# Altium PCB PCB1.PcbDoc
Units mil, origin at the board's own origin, x right, y up, seen from the top; angles counter-clockwise.
Board outline 6000 x 4000 mil, 2 copper layers (Top Layer, Bottom Layer); 24 components, 24 nets, 167 pads, 20 vias.
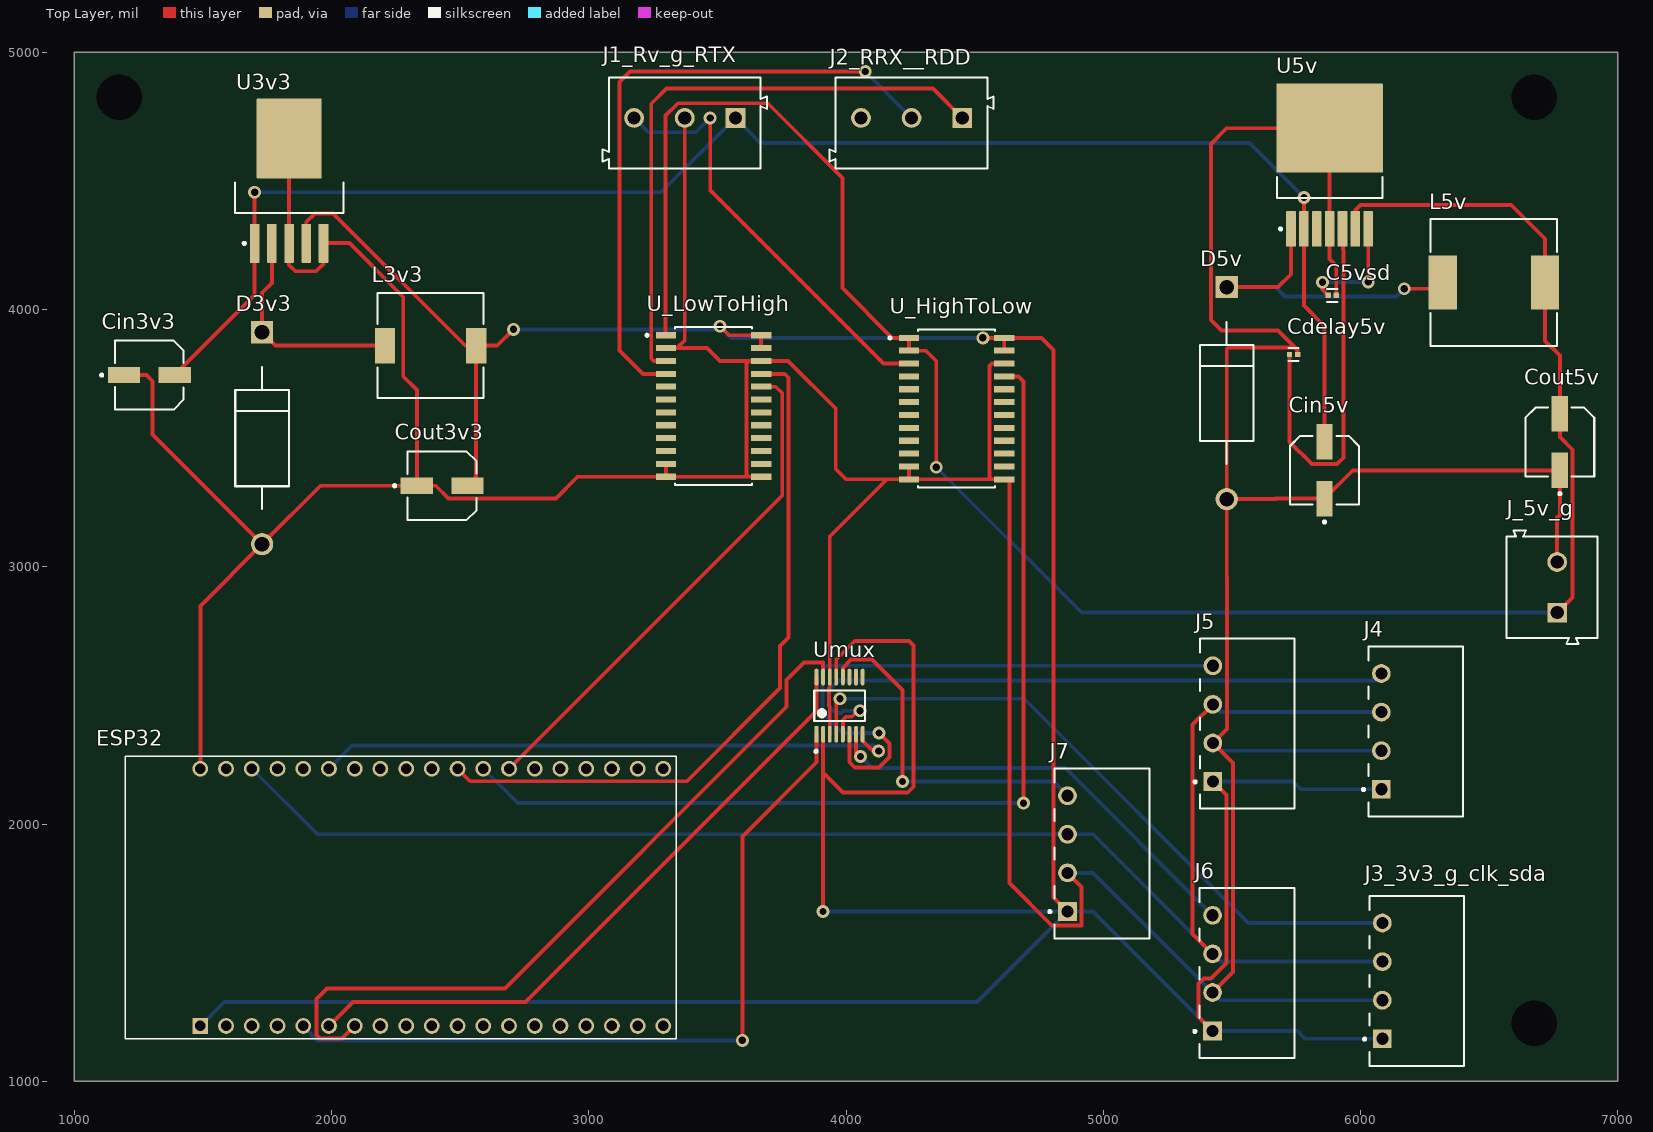
[diagram p0: Top Layer view]
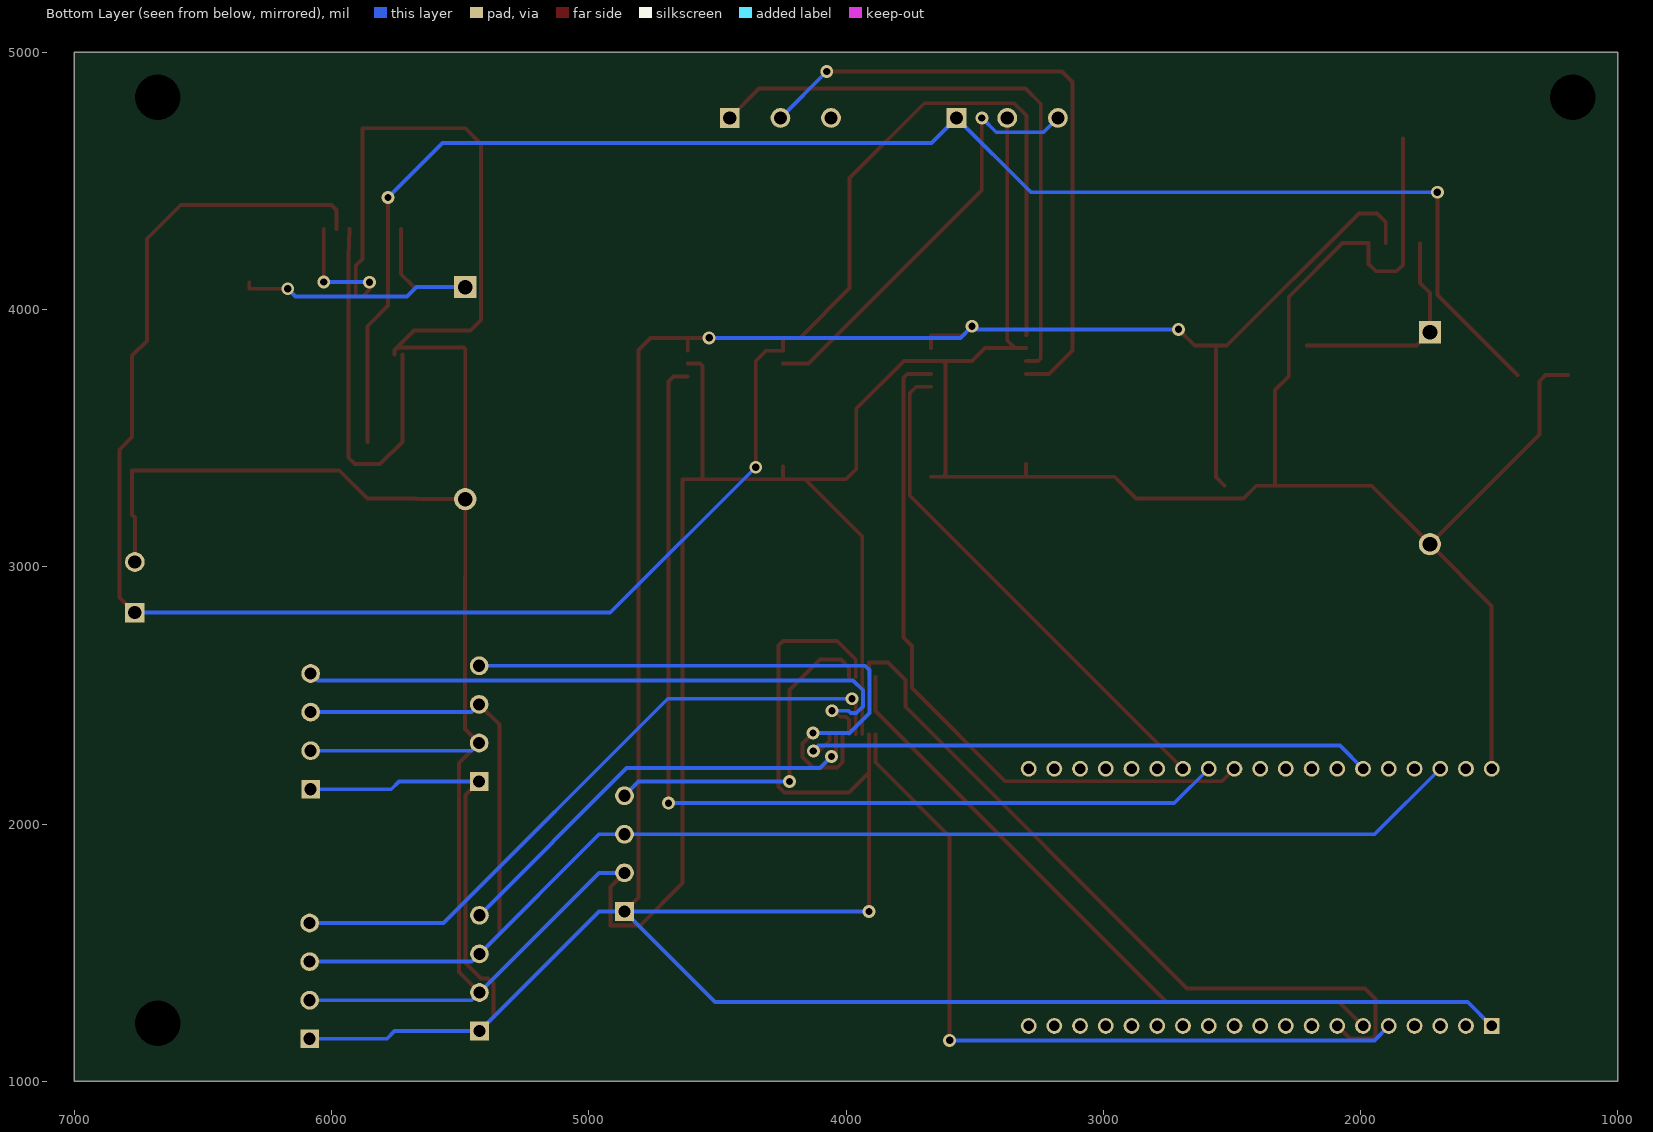
[diagram p1: Bottom Layer view, seen from below]
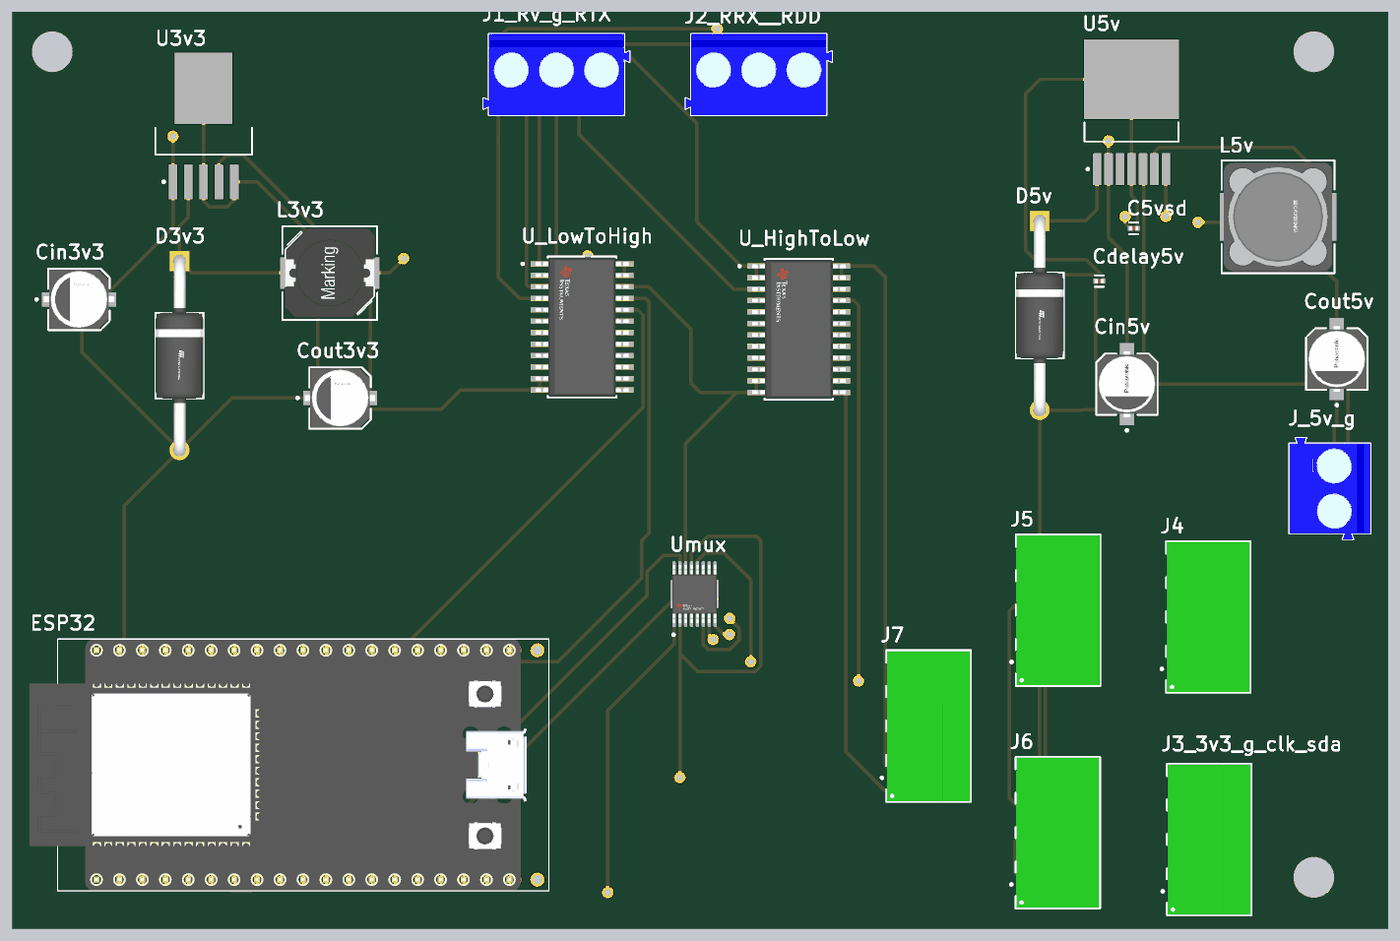
[diagram p2: 3D render of the assembled board from above, using the file's embedded part models]

## Layer stack, top to bottom
Top Solder: solder mask 0.4, Solder Resist, Dk 3.5
Top Layer: signal copper 1.4
Dielectric 1: dielectric 12.6, FR-4, Dk 4.8
Bottom Layer: signal copper 1.4
Bottom Solder: solder mask 0.4, Solder Resist, Dk 3.5

## Board outline
1000,1000 7000,1000 7000,5000 1000,5000

## Design rules (kind name [scope] priority, off if disabled: settings)
Clearance [All] p1: gap=10 ignorepadtopadclearanceinfootprint=FALSE except(0: Arc-Hole Track-Hole SMDPad-Hole THPad-Hole Via-Hole Fill-Hole Poly-Hole Region-Hole Text-Hole)
PolygonConnect [All] p1: connectstyle=Relief reliefconductorwidth=10 reliefentries=4 polygonreliefangle="90 Angle" airgapwidth=10
RoomDefinition Sheet1 [InComponentClass('Sheet1')] p1: confinementstyle=ConfineIn formatcopy=TRUE lockcomponents=FALSE outline 965,975 7045,975 7045,5015 965,5015
RoutingVias [All] p1: holewidth=28 width=50 viastyle="Through Hole" minholewidth=28 minwidth=50 maxholewidth=28 maxwidth=50
SolderMaskExpansion [All] p1: expansion=4 istentingtop=FALSE
Width [All] p1: maxlimit=20 minlimit=10 preferedwidth=15 minimp=50.000000 maximp=50.000000 favimp=50.000000
30 further rules are at their usual default settings.

## Components (designator, comment, footprint, x,y, rotation, side; value= is the part's Value field where it differs from the comment)
C5vsd "C0402C104J4RACTU" FP-C0402-BB-MFG 5890,4055 r0 top value="0.10 μF"
Cdelay5v "C0402C104J4RACTU" FP-C0402-BB-MFG 5740,3825 r0 top value="0.10 μF"
Cin3v3 "EEEFTE221XAP" FP-FTD8-MFG 1291.57,3745 r0 top
Cin5v "20SVPF120M" FP-OS-CON-SMT-C6-MFG 5860,3375 r90 top
Cout3v3 "EEEFTE221XAP" FP-FTD8-MFG 2430,3315 r0 top
Cout5v "20SVPF120M" FP-OS-CON-SMT-C6-MFG 6775,3485 r90 top
D3v3 "1N5822" FP-DO-201AD-MFG 1730,3500 r270 top
D5v "1N5822" FP-DO-201AD-MFG 5480,3675 r270 top
ESP32 "ESP32-DEVKITC-32D" MODULE_ESP32-DEVKITC-32D 2267.95,1715 r90 top
J1_Rv_g_RTX "691101710003" 691101710003 3373.14,4725.31 r180 top
J2_RRX__RDD "691101710003" 691101710003 4254.99,4725.31 r180 top
J3_3v3_g_clk_sda "1803293" FP-1803293-MFG 6218.86,1390 r90 top
J4 "1803293" FP-1803293-MFG 6215,2360 r90 top
J5 "1803293" FP-1803293-MFG 5560,2390 r90 top
J6 "1803293" FP-1803293-MFG 5558.86,1420 r90 top
J7 "1803293" FP-1803293-MFG 4995,1885 r90 top
J_5v_g "691101710002" 691101710002 6745,2920 r90 top
L3v3 "7447714221" "WE-PD 1050" 2385,3860 r0 top
L5v "SRR1210-680M" FP-SRR1210-MFG 6518.82,4105 r0 top value=68uH
U3v3 "LM2575SX-3.3/NOPB" KTT0005B_L 1835,4501.61 r90 top
U5v "LM2598S-5.0/NOPB" KTW0007B_N 5880,4561.3 r90 top
U_HighToLow "SN74LVC4245ADW" FP-DW0024A-MFG 4430,3615 r0 top
U_LowToHigh "SN74LVC4245ADW" FP-DW0024A-MFG 3485,3625 r0 top
Umux "TMUX1108PWR" FP-PW0016A-IPC_B 3975,2460 r90 top

## Footprints (in the part's own frame and the unit in brackets; to place one, negate y for a bottom-side part, rotate by r counter-clockwise, add the part's x,y. Pads: shape width x height; smd on the part's side, far side on the other; paste and mask are expansions set on the pad)
691101710002 [mm] "5,00mm - modular - blue - Horizontal entry with pressure clamp - 12,6mm height - 02p"
  rect 1.95x1.95 hole 1.3: 1(-2.5,-0.5)
  round 1.95 hole 1.3: 2(2.5,-0.5)
  silkscreen extent -5.6,-4.5 5.6,4.5, body extent -5.6,-4.5 5.6,4.5, height 12.65
691101710003 [mm] "5,00mm - modular - blue - Horizontal entry with pressure clamp - 12,6mm height - 03p"
  rect 1.95x1.95 hole 1.3: 1(-5,-0.5)
  round 1.95 hole 1.3: 2(0,-0.5) 3(5,-0.5)
  silkscreen extent -8.1,-4.5 8.1,4.5, body extent -8.1,-4.5 8.1,4.5, height 12.65
FP-1803293-MFG [mm]
  rect 1.85x1.85 hole 1.2 paste-1000 mask+0: 1(-5.715,3.4)
  round 1.85 hole 1.2 paste-1000 mask+0: 2(-1.905,3.4) 3(1.905,3.4) 4(5.715,3.4)
  silkscreen extent -8.39,-4.68 8.39,5.27, body extent -8.49,-4.77 8.49,4.77, height 0.25
FP-C0402-BB-MFG [mm]
  rect 0.52x0.52 smd paste+0 mask+0: 1(-0.4,0) 2(0.4,0)
  silkscreen extent -0.5,-0.64 0.5,0.64, body extent -0.8,-0.4 0.8,0.4, height 0.25
FP-DO-201AD-MFG [mm]
  rect 2.2x2.2 hole 1.45 paste-1000 mask+0: 1(-10.47,0)
  round 2.2 hole 1.45 paste-1000 mask+0: 2(10.47,0)
  silkscreen extent -7,-2.65 7,2.65, body extent -11.67,-2.75 11.67,2.75, height 0.25
FP-DW0024A-MFG [mm]
  rect 2x0.6 smd paste-1000 mask+0: 1(-4.7,6.985) 2(-4.7,5.715) 3(-4.7,4.445) 4(-4.7,3.175) 5(-4.7,1.905) 6(-4.7,0.635) 7(-4.7,-0.635) 8(-4.7,-1.905) 9(-4.7,-3.175) 10(-4.7,-4.445) 11(-4.7,-5.715) 12(-4.7,-6.985) 13(4.7,-6.985) 14(4.7,-5.715) 15(4.7,-4.445) 16(4.7,-3.175) 17(4.7,-1.905) 18(4.7,-0.635) 19(4.7,0.635) 20(4.7,1.905) 21(4.7,3.175) 22(4.7,4.445) 23(4.7,5.715) 24(4.7,6.985)
  silkscreen extent -6.7,-7.8 3.8,7.8, body extent -5.8,-7.98 5.8,7.98, height 0.25
FP-FTD8-MFG [mm]
  rect 3.2x1.6 smd paste+0 mask+0: 1(-2.5,0) 2(2.5,0)
  silkscreen extent -4.82,-3.4 3.4,3.4, body extent -4.35,-3.65 4.35,3.65, height 0.25
FP-OS-CON-SMT-C6-MFG [mm]
  rect 3.5x1.6 smd paste+0 mask+0: 1(-2.8,0) 2(2.8,0)
  silkscreen extent -5.22,-3.4 3.4,3.4, body extent -4.8,-3.65 4.8,3.65, height 0.25
FP-PW0016A-IPC_B [mm]
  rect 1.655x0.381 smd paste+0 mask+0: 1(-2.825,2.275)
  rrect100% 1.655x0.381 smd paste+0 mask+0: 2(-2.825,1.625) 3(-2.825,0.975) 4(-2.825,0.325) 5(-2.825,-0.325) 6(-2.825,-0.975) 7(-2.825,-1.625) 8(-2.825,-2.275) 9(2.825,-2.275) 10(2.825,-1.625) 11(2.825,-0.975) 12(2.825,-0.325) 13(2.825,0.325) 14(2.825,0.975) 15(2.825,1.625) 16(2.825,2.275)
  silkscreen extent -4.63,-2.5 1.5,2.5, body extent -3.9,-2.75 3.9,2.75, height 0.25
FP-SRR1210-MFG [mm]
  rect 2.8x5.3 smd paste+0 mask+0: 1(-5.05,0) 2(5.05,0)
  silkscreen extent -6.25,-6.25 6.25,6.25, body extent -6.55,-6.35 6.55,6.35, height 0.25
KTT0005B_L [mm] "DPAK, 5-Leads, Body 10.65x9.65mm, Pitch 1.7mm, IPC High Density"
  rrect11% 3.85x0.95 smd: 1(-6.2,3.4) 2(-6.2,1.7) 3(-6.2,0) 4(-6.2,-1.7) 5(-6.2,-3.4)
  rrect2% 7.9x6.4 smd: 6(4.15,0)
  silkscreen extent -6.32,-5.35 -0.2,5.35, body extent -3.2,-5.32 6.45,5.33, height 4.83
KTW0007B_N [mm] "DPAK, 7-Leads, Body 9.4x10.4mm, Pitch 1.27mm, IPC Medium Density"
  rrect11% 3.5x0.95 smd: 1(-6.3,3.81) 2(-6.3,2.54) 3(-6.3,1.27) 4(-6.3,0) 5(-6.3,-1.27) 6(-6.3,-2.54) 7(-6.3,-3.81)
  rrect1% 8.8x10.5 smd: 8(3.65,0)
  silkscreen extent -6.42,-5.2 -1.15,5.2, body extent -3.25,-5.2 6.15,5.2, height 4.65
MODULE_ESP32-DEVKITC-32D [mm]
  rect 1.56x1.56 / inner round 1.56 / far side rect 1.56x1.56 hole 1.04: 1(-12.7,19.76)
  round 1.56 hole 1.04: 2(-12.7,17.22) 3(-12.7,14.68) 4(-12.7,12.14) 5(-12.7,9.6) 6(-12.7,7.06) 7(-12.7,4.52) 8(-12.7,1.98) 9(-12.7,-0.56) 10(-12.7,-3.1) 11(-12.7,-5.64) 12(-12.7,-8.18) 13(-12.7,-10.72) 14(-12.7,-13.26) 15(-12.7,-15.8) 16(-12.7,-18.34) 17(-12.7,-20.88) 18(-12.7,-23.42) 19(-12.7,-25.96) 20(12.7,19.76) 21(12.7,17.22) 22(12.7,14.68) 23(12.7,12.14) 24(12.7,9.6) 25(12.7,7.06) 26(12.7,4.52) 27(12.7,1.98) 28(12.7,-0.56) 29(12.7,-3.1) 30(12.7,-5.64) 31(12.7,-8.18) 32(12.7,-10.72) 33(12.7,-13.26) 34(12.7,-15.8) 35(12.7,-18.34) 36(12.7,-20.88) 37(12.7,-23.42) 38(12.7,-25.96)
  silkscreen extent -13.95,-27.25 13.95,27.15, body extent -13.97,-24.8 13.97,30.3, height 3.25
"WE-PD 1050" [mm] "SMD Inductor, 2-Leads, Body 10,0x10,0mm"
  rect 2x3.5 smd: 1(-4.5,0) 2(4.5,0)
  silkscreen extent -5.25,-5.2 5.25,5.2, body extent -5,-5 5,5, height 4.75

## Part data
C5vsd Cdelay5v: library part CMP-1034-02068-3, "CAP CER 0.1UF 16V 5% X7R 0402", Capacitance="0.10 μF", Manufacturer=Kemet, Package=C0402-BB, Temperature="-55°C to +125°C", Temperature Characteristic=X7R, Temperature Coefficient=15%, Temperature Range High=+125°C, Temperature Range Low=-55°C, Tolerance=0.05, Voltage Rating="16 V", Automotive=No, Category=Cap, ComponentLink2Description=Datasheet, ComponentLink2URL=https://content.kemet.com/datasheets/KEM_C1002_X7R_SMD.pdf, Device Class L1="Passive Components", Device Class L2=Capacitors, Device Class L3="Ceramic Capacitors", Digikey Description="CAP CER 0.1UF 16V 5% X7R 0402", Height=0.55mm, Ipc Land Pattern Name=CAPC10050X50, Lead Free=Yes, Manufacturer Part Number=C0402C104J4RACTU, Material=Ceramic, Mouser Description="CAP CER 0.1UF 16V X7R 0402", Octopart=https://octopart.com/c0402c104j4ractu-kemet-12573893, RoHS=TRUE
Cin3v3 Cout3v3: library part CMP-05427-000088-1, "CAP ALUM 220UF 20% 25V SMD", Capacitance=220uF, Case/Package=Radial, Dielectric Material=Aluminium, ESR (Equivalent Series Resistance)=160mR, Leakage Current=55uA, Max Operating Temperature=105°C, Min Operating Temperature=-55°C, Package Quantity=1, Ripple Current=600mA, Tolerance=20%, Voltage=25V, Construction=Cylindrical, Contact Plating=Tin, Diameter=6.3mm, Height=7.7mm, Height - Seated (Max)=0.315inch, Lead Diameter=0.65mm, Lead Free="Lead Free", Lead Pitch=1.8mm, Length=7.7mm, Life (Hours)=2000Hour, Mount="Surface Mount", Number of Pins=8, Packaging="Tape and Reel", Radiation Hardening=No, REACH SVHC="No SVHC", Ripple Current (AC)=600mA, RoHS Compliant=Yes, Series=FT, Termination=SMD/SMT, Voltage Rating=25V, Voltage Rating (DC)=25V
Cin5v Cout5v: library part CMP-05428-001333-1, "Conductive Polymer Aluminum Solid Capacitors (OS-CON) 120uF ±20% 20V", Capacitance=120uF, Case/Package=Radial, ESR (Equivalent Series Resistance)=25mR, Leakage Current=480uA, Max Operating Temperature=105°C, Min Operating Temperature=-55°C, Package Quantity=1000, Ripple Current=3.2A, Tolerance=20%, Voltage=20V, Construction=Cylindrical, Diameter=6.3mm, Dissipation Factor=12%, Height=5.9mm, Height - Seated (Max)=0.236inch, Lead Free="Lead Free", Length=5.9mm, Life (Hours)=5000Hour, Material=Polymer, Mount="Surface Mount", Number of Pins=6, Packaging="Tape and Reel", Polarity=Polar, Radiation Hardening=No, REACH SVHC="No SVHC", Ripple Current (AC)=3.2A, RoHS Compliant=Yes, Series="OS-CON™, SVPF", Termination=SMD/SMT, Voltage Rating=20V, Voltage Rating (DC)=20V
D3v3 D5v: library part CMP-12187-000025-1, "DIODE SCHOTTKY 40V 3A DO201AD", Forward Current=3A, Manufacturer=STMicroelectronics, Max Junction Temp=+150°C, Max Repetitive Reverse Voltage=40V, Max Surge Forward Current=80A, Package=DO-201AD, Peak Reverse Current=2mA, Temperature="to +150°C", Automotive=No, Category=Diode, ComponentLink2Description=Datasheet, ComponentLink2URL=https://www.st.com/resource/en/datasheet/1n5822.pdf, Device Class L1="Discrete Semiconductors", Device Class L2=Diodes, Device Class L3="Schottky Diodes", Digikey Description="DIODE SCHOTTKY 40V 3A DO201AD", Height=5.3mm, Lead Free=Yes, Manufacturer Part Number=1N5822, Mouser Description="Schottky Diodes & Rectifiers Vr/40V Io/3A BULK", Octopart=https://octopart.com/1n5822-stmicroelectronics-323225, RoHS=TRUE, Temperature Range High=+150°C
ESP32: "WiFi Development Tools (802.11) ESP32 General Development Kit, ESP32-WROOM-32D on the board", Package=None, Availability="In Stock", Check_prices=https://www.snapeda.com/parts/ESP32-DEVKITC-32D/Espressif+Systems/view-part/?ref=eda, MF="Espressif Systems", MP=ESP32-DEVKITC-32D, Price=None, Purchase-URL=https://pricing.snapeda.com/search/part/ESP32-DEVKITC-32D/?ref=eda, SnapEDA_Link=https://www.snapeda.com/parts/ESP32-DEVKITC-32D/Espressif+Systems/view-part/?ref=snap
J1_Rv_g_RTX J2_RRX__RDD: library part CMP-1502-03257-1, "Series 101 - 5.00 mm Horizontal Entry Modular with Pressure Clamp WR-TBL, 3 pin", Manufacturer="Wurth Elektronik", Operating Temperature=-40to105degC, Datasheet URL=http://katalog.we-online.de/em/datasheet/6911017100xx.pdf, Manufacturer URL=http://www.we-online.de, Mounting Technology=THT, Package Reference=691101710003, Packaging=Box, Part Number=691101710003, Pin Number=3, Pitch=5.00mm, Publisher=WurthElektronik
J3_3v3_g_clk_sda J4 J5 J6 J7: library part CMP-09399-000011-1, "TERM BLOCK HDR 4POS 90DEG 3.81MM", Color=Green, Current=8A, Flammability Rating="UL94 V-0", Package Quantity=50, Test Voltage=2.5kV, Voltage=300V, Voltage Rating=160V, Voltage Rating (DC)=640mV, Approvals=UL, Connector Type=PCB, Contact Gender=Male, Contact Plating=Tin, Current Rating=8A, Depth=9.2mm, Housing Color=Green, Housing Material=Polybutylene, Lead Free="Lead Free", Length=16.63mm, Max Current Rating=8A, Mount="Through Hole", Number of Contacts=4, Number of Levels=1, Number of Poles=4, Number of Positions=4, Number of Positions Per Level=4, Number of Rows=1, Orientation="Right Angle", Packaging=Bulk, Pitch=3.81mm, Series=MC, Termination=Solder, Weight=4oz, Width=18.7mm
J_5v_g: library part CMP-1502-03256-1, "Series 101 - 5.00 mm Horizontal Entry Modular with Pressure Clamp WR-TBL, 2 pin", Manufacturer="Wurth Elektronik", Operating Temperature=-40to105degC, Datasheet URL=http://katalog.we-online.de/em/datasheet/6911017100xx.pdf, Manufacturer URL=http://www.we-online.de, Mounting Technology=THT, Package Reference=691101710002, Packaging=Box, Part Number=691101710002, Pin Number=2, Pitch=5.00mm, Publisher=WurthElektronik
L3v3: library part CMP-1396-00021-1, "SMD-Shielded Power Inductor WE-PD, L=220 µH", Inductance="220 ÂµH", Manufacturer="Wuerth Elektronik", ComponentLink1Description="Manufacturer URL", ComponentLink1URL=http://www.we-online.com, ComponentLink2Description=Datasheet, ComponentLink2URL=http://www.we-online.de/katalog/media/pdf/7447714221.pdf, PackageReference="WE-PD 1050", PartNumber=7447714221
L5v: library part CMP-07248-000002-1, "FIXED IND 68UH 3A 102 MOHM SMD", Inductance=68uH, Manufacturer=Bourns, Package=SRR1210, Rms Current=3A, Saturation Current=2.7A, Self Resonant Frequency=3.8MHz, Series Resistance=102mΩ, Temperature="-40°C to +125°C", Temperature Range High=+125°C, Temperature Range Low=-40°C, Test Frequency=2.52MHz, Tolerance=20%, Automotive=No, Category=Ind, ComponentLink2Description=Datasheet, ComponentLink2URL=https://www.bourns.com/docs/Product-Datasheets/SRR1210.pdf, Composition=Wirewound, Core Material=Ferrite, Device Class L1="Passive Components", Device Class L2=Inductors, Device Class L3="Fixed Inductors", Digikey Description="FIXED IND 68UH 3A 102 MOHM SMD", Height=10mm, Lead Free=Yes, Manufacturer Part Number=SRR1210-680M, Mouser Description="Fixed Inductors 68uH 20% SMD 1210", Octopart=https://octopart.com/srr1210-680m-bourns-10487145, Q Factor=12, RoHS=TRUE, Shielding=true
U3v3: library part CMP-0069-00081-3, "SIMPLE SWITCHER® 1A Step-Down Voltage Regulator, 5-pin TO-263, Pb-Free", Manufacturer="Texas Instruments", PackageTopMarking="NSUZXYTTE#*LM2575S*-3.3 P+", PowerWise=N, Code_JEDEC=MO-169-AB, ComponentLink1Description="Datasheet URL", ComponentLink1URL=http://www.ti.com/general/docs/lit/getliterature.tsp?genericPartNumber=LM2575-N&fileType=pdf, CompType=Switcher, PackageDescription="TO-263, Molded, .400 x .390 x .180in, 5 Lead, .067in Pitch, Surface Mount", PackageReference=KTT0005B, PinCount=5, RoHS=Y
U5v: library part CMP-0069-00280-3, "SIMPLE SWITCHER® Power Converter 150 KHz 1A Step-Down Voltage Regulator with Features, 7-pin TO-263, Pb-Free", Manufacturer="Texas Instruments", PackageTopMarking="NSUZXYTTE#*LM2598S*-5.0 P+", PowerWise=N, Code_JEDEC=MO-169-AC, ComponentLink1Description="Datasheet URL", ComponentLink1URL=http://www.ti.com/general/docs/lit/getliterature.tsp?genericPartNumber=LM2598&fileType=pdf, CompType=Switcher, PackageDescription="TO-263, Molded, .400 x .390 x .180in Body, 7 Lead, .050in Pitch, Surface Mount", PackageReference=KTW0007B, PinCount=7, RoHS=Y
U_HighToLow U_LowToHigh: library part CMP-04899-000091-1, "IC TRNSLTR BIDIRECTIONAL 24SOIC", Case/Package=SOIC, High Level Output Current=-24mA, Low Level Output Current=24mA, Max Operating Temperature=85°C, Max Supply Current=80uA, Max Supply Voltage=5.5V, Min Operating Temperature=-40°C, Min Supply Voltage=4.5V, Operating Supply Voltage=5V, Package Quantity=25, Contact Plating=Gold, Direction=Bidirectional, Height=2.35mm, Lead Free="Lead Free", Length=15.4mm, Logic Function=Translator, Mount="Surface Mount", Number of Bits=8, Number of Channels=8, Number of Circuits=8, Number of Elements=1, Number of Outputs=8, Number of Pins=24, Output Type=Voltage, Packaging=Rail/Tube, Polarity=Non-Inverting, Propagation Delay=9.8ns, Quiescent Current=80uA, Radiation Hardening=No, REACH SVHC="No SVHC", RoHS Compliant=Yes, Series=74LVC, Technology=CMOS, Turn-On Delay Time=6.7ns, Weight=0.022025oz, Width=7.52mm
Umux: library part CMP-04892-000107-1, "IC SWITCH SINGLE 16TSSOP", RoHS Compliant=Yes

## Free pads (board coordinates)
  round 61.42 hole 177: 3(6675,1225) 4(6675,4825) 5(1175,4825)

## Via types
v1: diameter 50, hole 28, Top Layer to Bottom Layer, 20 vias

## Nets (pads, with @x,y where several pads share a name; then routed paths per layer and width w, separated by ;. In a path a pad name is that pad's centre, name@x,y a point inside that pad or via, vN(x,y) a via of type N, cw(c..) or ccw(c..) an arc to the next point about the centre after c; other vN are vias at no path point)
GND: C5vsd.2 Cdelay5v.2 Cin3v3.1 Cin5v.1 Cout3v3.1 Cout5v.1 D3v3.2 D5v.2 ESP32.20 J1_Rv_g_RTX.2 J3_3v3_g_clk_sda.2 J4.2 J5.2 J6.2 J7.2 J_5v_g.2 U3v3.3 U3v3.5 U3v3.6 U5v.4 U5v.8 U_HighToLow.11 U_HighToLow.12 U_HighToLow.13 U_HighToLow.22 U_LowToHigh.2 U_LowToHigh.11 U_LowToHigh.12 U_LowToHigh.13 U_LowToHigh.22 Umux.3 Umux.14 | length 21663.3
  Top Layer w15: Cin3v3.1 1280,3745 1304,3721 1304,3513.8 D3v3.2 ; ESP32.20 1490,2847.8 D3v3.2 ; U3v3.6 U3v3.3 1835,4173.72 1860,4148.72 1940,4148.72 1968.86,4177.57 U3v3.5 1968.86,4258 2070,4258 2279,4049 2279,3740 2332,3687 Cout3v3.1@2332,3315 ; U_LowToHigh.11 U_LowToHigh.12 ; U_LowToHigh.2 3343.15,3850 ; J1_Rv_g_RTX.2 3373.15,3880 3343.15,3850 ; U_LowToHigh.13 3623,3350 ; Umux.3 3936.61,2457.89 3934.5,2460 3934.5,2527.39 3936.61,2529.5 Umux.14 3936.61,3117.61 4159,3340 ; U_HighToLow.11 U_HighToLow.12 ; U_HighToLow.22 4568,3790 4558,3780 4558,3350 4568,3340 ; J7.2 4916,1755.14 4916,1606 4800,1606 4635,1771 4635,3340 U_HighToLow.13 4568,3340 ; J6.2 5504,1424 5504,2237.14 J5.2 5481,2369.86 5481,2958 5480,2959 D5v.2 ; Cdelay5v.2 5755.75,3840 ; C5vsd.2 5905.75,4171 5880,4196.75 U5v.4 U5v.8 5480,4705 5419,4644 5419,3960 5460,3919 5680,3919 5755.75,3843.25 5755.75,3840 ; J_5v_g.2 6764.69,3191 6775,3201.31 Cout5v.1 5970,3374.76 Cin5v.1 5670.97,3264.76 5669,3262.8 D5v.2 ; D3v3.2 1957.2,3315 Cout3v3.1 Cout3v3.1@2332,3315 ; Cout3v3.1@2332,3315 2405,3315 2454,3266 2872,3266 2956,3350 U_LowToHigh.12 ; U_LowToHigh.12 3623,3350 ; 3343.15,3850 3460,3850 3510,3800 3623,3800 ; 3623,3350 3613,3360 3613,3790 3623,3800 ; 3623,3800 U_LowToHigh.22 3775,3800 3960,3615 3960,3380 4000,3340 4159,3340 ; 4159,3340 U_HighToLow.12 ; U_HighToLow.12 4568,3340 ; D5v.2 5480,3846 5487,3853 5742.75,3853 5755.75,3840
  Bottom Layer w15: J7.2 4960,1810 J6.2 5455,1315 J3_3v3_g_clk_sda.2 ; J5.2 5456.14,2285 J4.2
NetC5vsd_1: C5vsd.1 U5v.7 | length 444.9
  Top Layer w15: v1(5852,4106) 5852,4077.25 C5vsd.1 ; v1(6030,4107) U5v.7
  Bottom Layer w15: v1(5852,4106) 5853,4107 v1(6030,4107)
NetCdelay5v_1: Cdelay5v.1 U5v.5 | length 1485
  Top Layer w15: Cdelay5v.1 5724.25,3485.58 5811,3398.84 5909,3398.84 5934,3423.84 5934,4207 U5v.5
NetCin3v3_2: Cin3v3.2 Cin5v.2 J1_Rv_g_RTX.1 U3v3.1 U5v.2 | length 6150.3
  Top Layer w15: Cin3v3.2 1701.14,4056.14 U3v3.1 v1(1701.14,4456) ; v1(5780,4436) U5v.2 5780,4015 5860,3935 Cin5v.2
  Bottom Layer w15: v1(1701.14,4456) 3281,4456 J1_Rv_g_RTX.1 3668,4647 5569,4647 v1(5780,4436)
NetCout3v3_2: Cout3v3.2 ESP32.1 J3_3v3_g_clk_sda.1 J4.1 J5.1 J6.1 J7.1 L3v3.2 U3v3.4 U_HighToLow.23 U_HighToLow.24 U_LowToHigh.23 U_LowToHigh.24 Umux.2 Umux.13 | length 16038.4
  Top Layer w15: U3v3.4 1901.93,4340 1935.93,4374 2006,4374 2520,3860 L3v3.2 ; Cout3v3.2 2562.17,3348.74 L3v3.2 ; v1(2707,3923) 2644,3860 L3v3.2 ; v1(3510,3935) 3545,3900 U_LowToHigh.24 U_LowToHigh.23 ; v1(3911.02,1660) 3911.02,2200 ; Umux.2 3911.02,2200 ; Umux.13 3962.2,2640 4034.2,2712 4245,2712 4263,2694 4263,2145 4240,2122 3989.02,2122 3911.02,2200 ; v1(4532,3890) U_HighToLow.24 ; U_HighToLow.23 U_HighToLow.24 ; J7.1 4807,1714.14 4807,3843 4760,3890 U_HighToLow.24 ; J6.1 5371,1249 5371,1380 5391,1400 5419,1400 5479,1460 5479,2112.14 J5.1
  Bottom Layer w15: ESP32.1 1583,1308 4509.14,1308 J7.1 ; v1(2707,3923) 3488.53,3923 3500.53,3935 v1(3510,3935) 3555,3890 v1(4532,3890) ; v1(3911.02,1660) J7.1 ; J5.1 5738,2165 5768,2135 J4.1 ; J3_3v3_g_clk_sda.1 5785,1165 5755,1195 J6.1 4960,1660 J7.1
NetCout5v_2: Cout5v.2 J_5v_g.1 L5v.2 U5v.6 U_HighToLow.1 U_HighToLow.2 U_LowToHigh.1 | length 8080
  Top Layer w15: U_LowToHigh.1 3299,3900 3299,4754 3347,4802 3696,4802 3986,4512 3986,4083 4179,3890 U_HighToLow.1 U_HighToLow.2 4311,3840 4351,3800 v1(4351,3387) ; U5v.6 5980,4387 6000,4407 6586,4407 6717.64,4275.36 L5v.2 6717.64,3878.36 6775,3821 Cout5v.2 6775,3504 6824,3455 6824,2880.88 J_5v_g.1
  Bottom Layer w15: v1(4351,3387) 4916.43,2821.57 J_5v_g.1
NetD3v3_1: D3v3.1 L3v3.1 U3v3.2 | length 860.5
  Top Layer w15: U3v3.2 1768.07,4103.07 1730,4065 D3v3.1 1782.2,3860 L3v3.1
NetD5v_1: D5v.1 L5v.1 U5v.1 | length 1338.2
  Top Layer w15: D5v.1 5680,4087.2 5730,4137.2 U5v.1 ; v1(6170,4081) 6320,4081 L5v.1
  Bottom Layer w15: D5v.1 5669.8,4087.2 5706,4051 6140,4051 v1(6170,4081)
NetESP32_5: ESP32.5 Umux.1 | length 3039.4
  Top Layer w15: v1(3597,1159) 3597,1951.57 3885.43,2240 Umux.1
  Bottom Layer w15: ESP32.5 1946,1159 v1(3597,1159)
NetESP32_6: ESP32.6 Umux.16 | length 2534.7
  Top Layer w15: ESP32.6 2083,1308 2754.43,1308 3885.43,2439 Umux.16
NetESP32_7: ESP32.7 Umux.15 | length 2944.6
  Top Layer w15: ESP32.7 2041,1166 1955,1166 1941,1180 1941,1320 1982,1361 2674,1361 3769,2456 3769,2560 3837,2628 3911,2628 Umux.15
NetESP32_22: ESP32.22 J3_3v3_g_clk_sda.3 J4.3 J5.3 J6.3 J7.3 | length 6408
  Top Layer w15: J6.3 5347.22,1572.78 5347.22,2386.08 J5.3
  Bottom Layer w15: ESP32.22 1945,1960 J7.3 4960,1960 J6.3 5455,1465 J3_3v3_g_clk_sda.3 ; J5.3 5456.14,2435 J4.3
NetESP32_25: ESP32.25 Umux.8 | length 2286.5
  Top Layer w15: Umux.8 4064.57,2323.68 4104.24,2284 v1(4127,2284)
  Bottom Layer w15: ESP32.25 2079.5,2304.5 4106.5,2304.5 v1(4127,2284)
NetESP32_30: ESP32.30 U_LowToHigh.21 | length 2758.1
  Top Layer w15: ESP32.30 2539,2166 3382,2166 3744,2528 3744,2692 3777,2725 3777,3735 3762,3750 U_LowToHigh.21
NetESP32_31: ESP32.31 U_HighToLow.21 | length 3877.7
  Top Layer w15: U_HighToLow.21 4670,3740 4690,3720 v1(4690,2081)
  Bottom Layer w15: ESP32.31 2724,2081 v1(4690,2081)
NetESP32_32: ESP32.32 U_LowToHigh.20 | length 1992.2
  Top Layer w15: ESP32.32 3752,3277 3752,3675 3727,3700 U_LowToHigh.20
NetJ1_Rv_g_RTX_3: J1_Rv_g_RTX.3 U_HighToLow.3 | length 1675.2
  Top Layer w15: v1(3472,4745) 3472,4464 4146,3790 U_HighToLow.3
  Bottom Layer w15: J1_Rv_g_RTX.3 3232.3,4689 3416,4689 v1(3472,4745)
NetJ2_RRX__RDD_1: J2_RRX__RDD.1 U_LowToHigh.3 | length 2331.6
  Top Layer w15: U_LowToHigh.3 3253,3800 3243,3810 3243,4800 3302,4859 4337.85,4859 J2_RRX__RDD.1
NetJ2_RRX__RDD_2: J2_RRX__RDD.2 U_LowToHigh.4 | length 2487.8
  Top Layer w15: U_LowToHigh.4 3211,3750 3120,3841 3120,4885 3160,4925 v1(4075,4925)
  Bottom Layer w15: v1(4075,4925) J2_RRX__RDD.2
NetJ3_3v3_g_clk_sda_4: J3_3v3_g_clk_sda.4 Umux.4 | length 2613.6
  Top Layer w15: Umux.4 3962.2,2472.2 v1(3977,2487)
  Bottom Layer w15: v1(3977,2487) 4693,2487 5565,1615 J3_3v3_g_clk_sda.4
NetJ4_4: J4.4 Umux.5 | length 2510.2
  Top Layer w15: Umux.5 3987.8,2404.42 4000.3,2416.92 4022.45,2416.92 4045.53,2440 v1(4055,2440)
  Bottom Layer w15: v1(4055,2440) 3990.53,2440 3981.53,2431 3960,2431 3934,2457 3934,2520 3972.5,2558.5 6054.64,2558.5 J4.4
NetJ5_4: J5.4 Umux.6 | length 2343
  Top Layer w15: Umux.6 4013.39,2240 4034.13,2219.26 4128.76,2219.26 4169.5,2260 4169.5,2312.5 v1(4128,2354)
  Bottom Layer w15: v1(4128,2354) 3987,2354 3909,2432 3909,2598 3926,2615 J5.4
NetJ6_4: J6.4 Umux.7 | length 1718.4
  Top Layer w15: Umux.7 4038.98,2279.02 v1(4056,2262)
  Bottom Layer w15: v1(4056,2262) 4100.85,2217.15 4852.85,2217.15 J6.4
NetJ7_4: J7.4 Umux.12 | length 1349.8
  Top Layer w15: Umux.12 3987.8,2606.8 4020,2639 4101.8,2639 4220,2520.8 v1(4220,2165)
  Bottom Layer w15: v1(4220,2165) 4806.14,2165 J7.4
pads on no net: ESP32.2 ESP32.3 ESP32.4 ESP32.8 ESP32.9 ESP32.10 ESP32.11 ESP32.12 ESP32.13 ESP32.14 ESP32.15 ESP32.16 ESP32.17 ESP32.18 ESP32.19 ESP32.21 ESP32.23 ESP32.24 ESP32.26 ESP32.27 ESP32.28 ESP32.29 ESP32.33 ESP32.34 ESP32.35 ESP32.36 ESP32.37 ESP32.38 J2_RRX__RDD.3 U5v.3 U_HighToLow.4 U_HighToLow.5 U_HighToLow.6 U_HighToLow.7 U_HighToLow.8 U_HighToLow.9 U_HighToLow.10 U_HighToLow.14 U_HighToLow.15 U_HighToLow.16 U_HighToLow.17 U_HighToLow.18 U_HighToLow.19 U_HighToLow.20 U_LowToHigh.5 U_LowToHigh.6 U_LowToHigh.7 U_LowToHigh.8 U_LowToHigh.9 U_LowToHigh.10 U_LowToHigh.14 U_LowToHigh.15 U_LowToHigh.16 U_LowToHigh.17 U_LowToHigh.18 U_LowToHigh.19 Umux.9 Umux.10 Umux.11